# EAGLE board LedEsp32_manualroute (EAGLE 9.6.2)
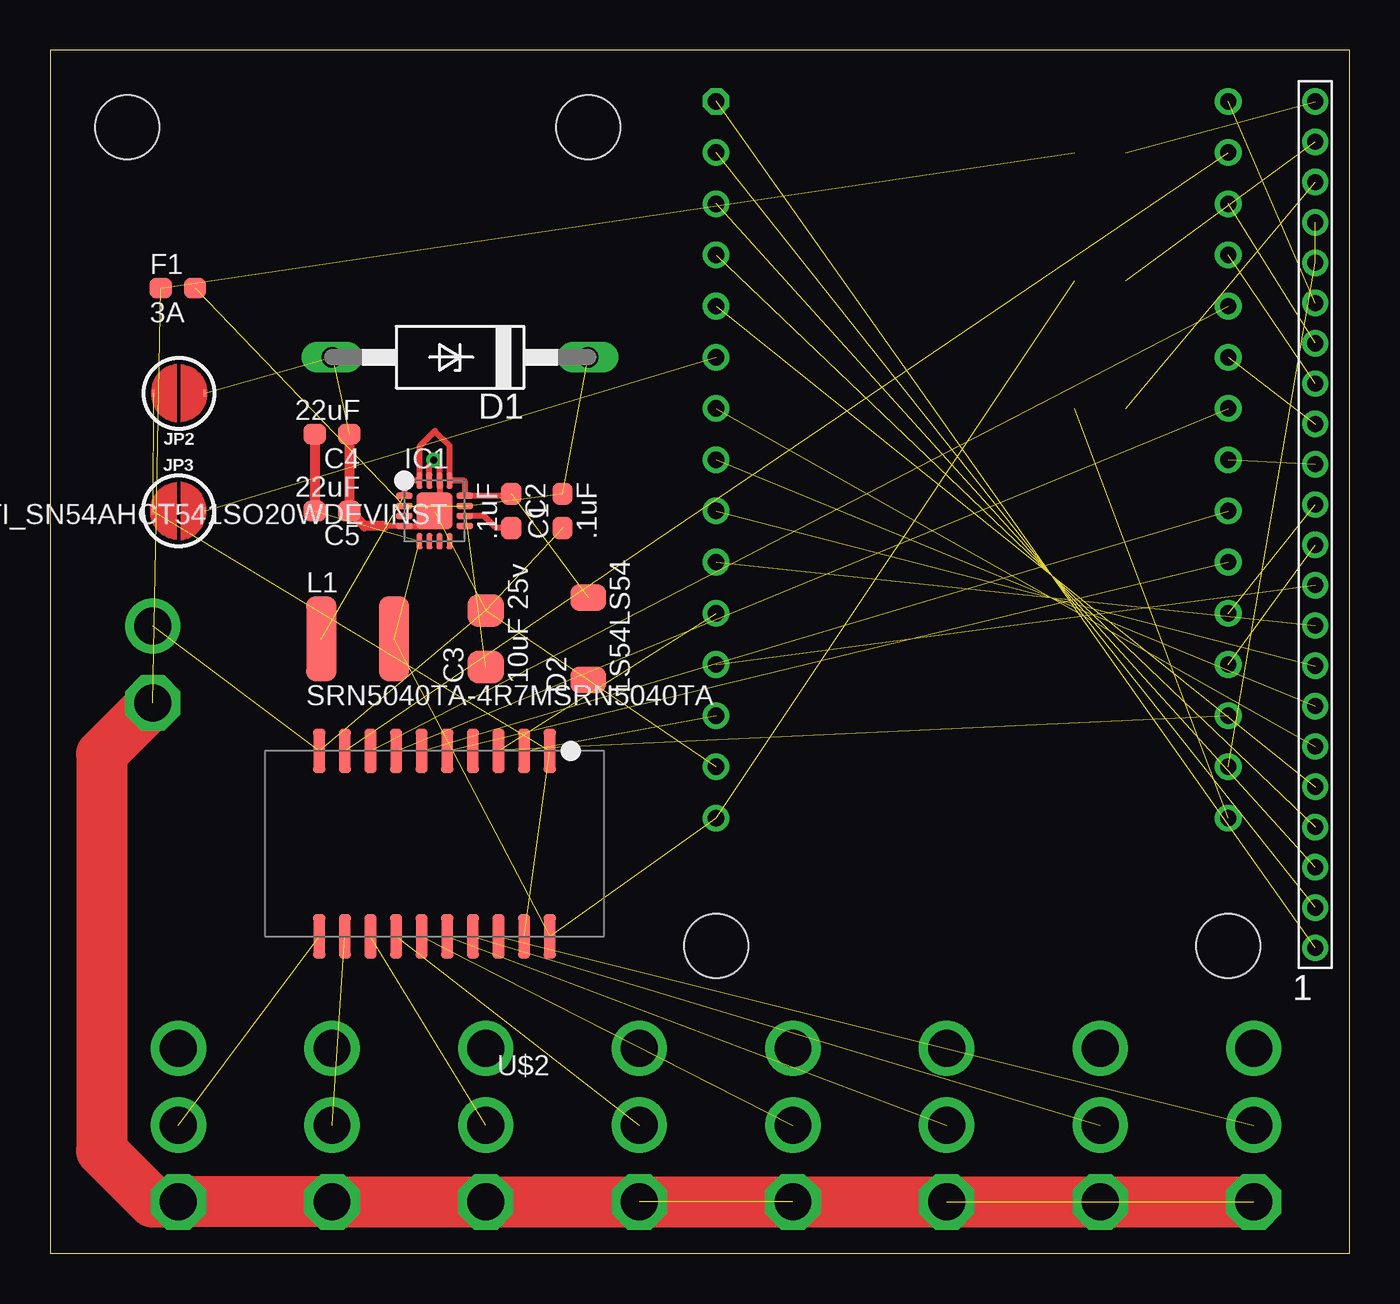
[diagram p0: board, top side]
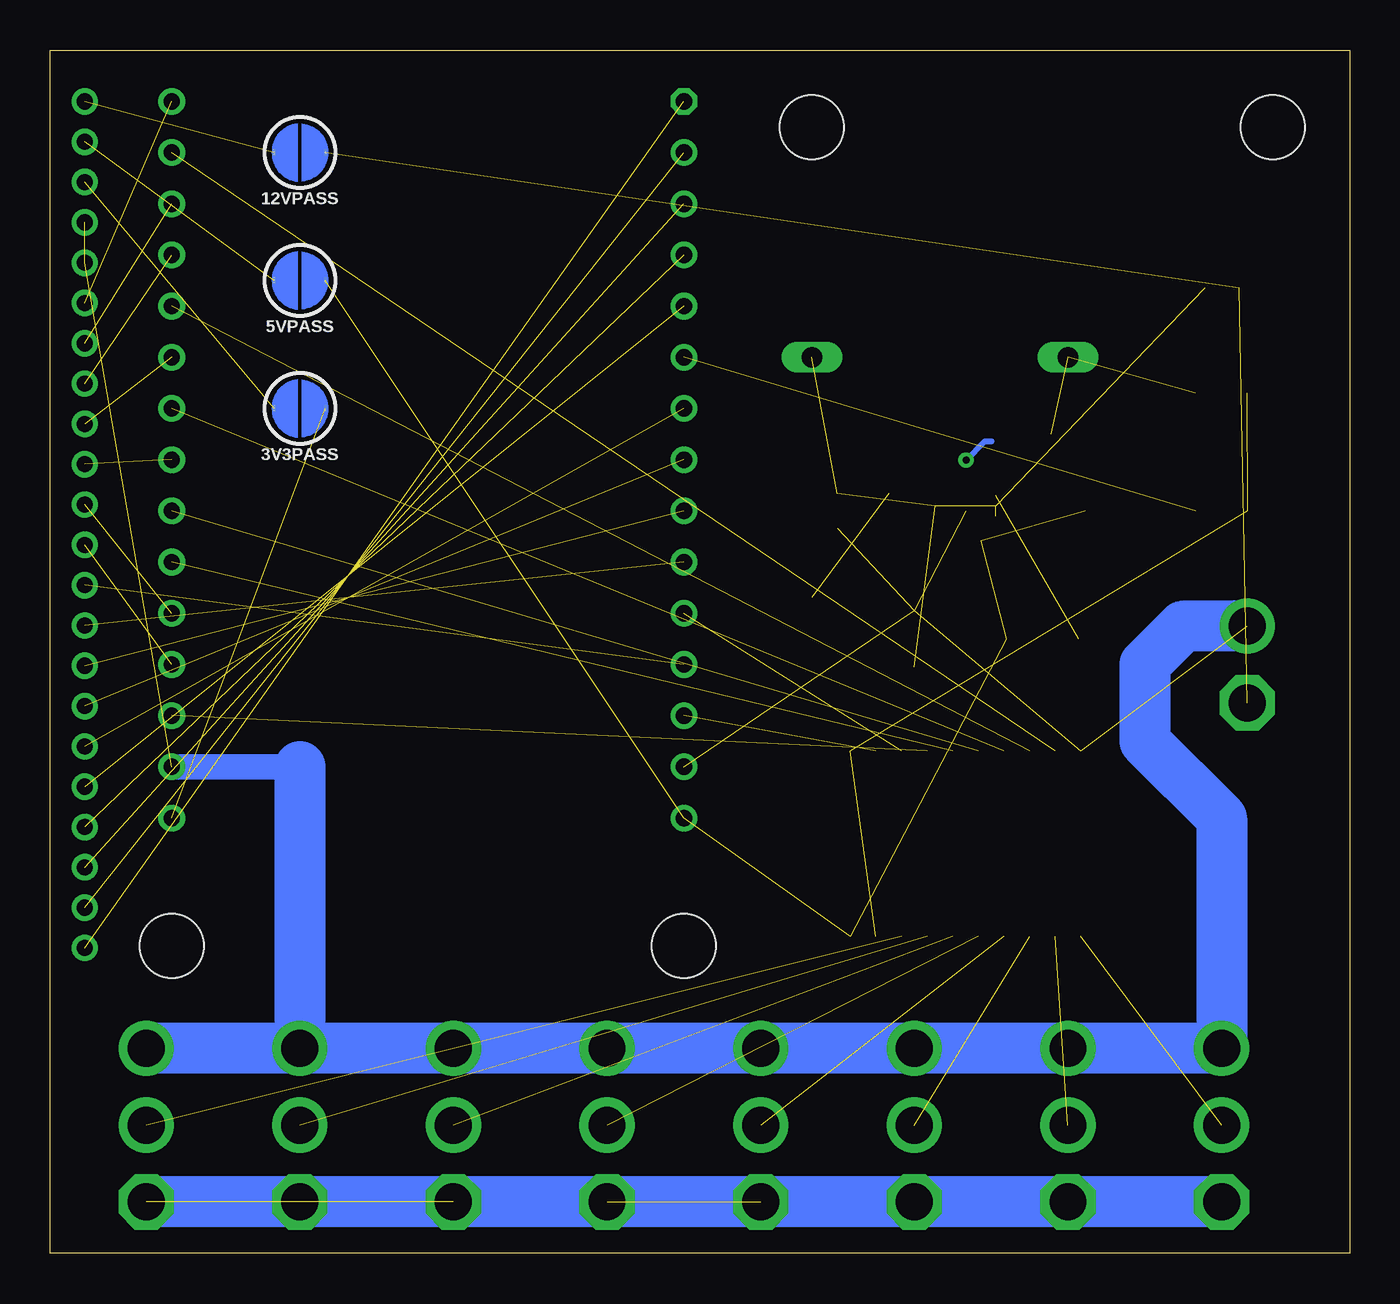
[diagram p1: board, bottom side, seen from below]

Size 64.44 x 59.68 mm. Coordinates in mm from the lower left corner, seen from the top.
Outline: 0,0 64.44,0 64.44,59.68 0,59.68 0,0
Copper layers (1*16): Top 0.035mm / dielectric 1.5mm / Bottom 0.035mm
Design rules "default *": minimum track width 8mil, minimum drill 0.35mm, track to track 8mil, track to pad 8mil, pad to pad 8mil, via to via 8mil, smd to smd 8mil, copper to edge 40mil, drill to drill 6mil, minimum pad ring 10mil, minimum via ring 8mil, stop-mask expansion 4mil, vias tented up to drill 0mil, thermal gap 10mil
Holes 3.17 mm at 3.81,55.88 26.67,55.88 33.02,15.24 58.42,15.24

## Footprints (pad centres in the part's own frame; a part is rotated, then mirrored left to right if it is on the bottom)
SMT-JUMPER_2_NO_SILK_ROUND = smd 0.152 x 0.305: 1 -1.27,0; 2 1.27,0
C0603 = smd 1.1 x 1: 1 -0.85,0; 2 0.85,0
C1206 = smd 1.6 x 1.8: 1 -1.4,0; 2 1.4,0
F126Z12 = drill 1.016 long: A 6.35,0; C -6.35,0
LS54 = smd 1.3 x 1.75: 1 -2.05,0; 2 2.05,0
R0603 = smd 1.1 x 1: 1 -0.85,0; 2 0.85,0
QFN16 = smd 0.8 x 0.3: 1 -1.5,0.75; 2 -1.5,0.25; 3 -1.5,-0.25; 4 -1.5,-0.75; 9 1.5,-0.75; 10 1.5,-0.25; 11 1.5,0.25; 12 1.5,0.75 | smd 0.3 x 0.8: 5 -0.75,-1.5; 6 -0.25,-1.5; 7 0.25,-1.5; 8 0.75,-1.5; 13 0.75,1.5; 14 0.25,1.5; 15 -0.25,1.5; 16 -0.75,1.5 | smd 1.8 x 1.8: TPAD 0,0
SRN5040TA = smd 1.5 x 4.2: 1 -1.8,0; 2 1.8,0
EXTCON = drill 1.829 octagon: 1 -3.81,0 | drill 1.829: 2 0,0; 3 3.81,0
ESP32_DEVKITV1 = drill 0.813 octagon: 1 -17.78,-12.7 | drill 0.813: 2 -15.24,-12.7; 3 -12.7,-12.7; 4 -10.16,-12.7; 5 -7.62,-12.7; 6 -5.08,-12.7; 7 -2.54,-12.7; 8 0,-12.7; 9 2.54,-12.7; 10 5.08,-12.7; 11 7.62,-12.7; 12 10.16,-12.7; 13 12.7,-12.7; 14 15.24,-12.7; 15 17.78,-12.7; 16 17.78,12.7; 17 15.24,12.7; 18 12.7,12.7; 19 10.16,12.7; 20 7.62,12.7; 21 5.08,12.7; 22 2.54,12.7; 23 0,12.7; 24 -2.54,12.7; 25 -5.08,12.7; 26 -7.62,12.7; 27 -10.16,12.7; 28 -12.7,12.7; 29 -15.24,12.7; 30 -17.78,12.7
SO20W = smd 0.6 x 2.2: 1 -5.715,-4.6; 2 -4.445,-4.6; 3 -3.175,-4.6; 4 -1.905,-4.6; 5 -0.635,-4.6; 6 0.635,-4.6; 7 1.905,-4.6; 8 3.175,-4.6; 9 4.445,-4.6; 10 5.715,-4.6; 11 5.715,4.6; 12 4.445,4.6; 13 3.175,4.6; 14 1.905,4.6; 15 0.635,4.6; 16 -0.635,4.6; 17 -1.905,4.6; 18 -3.175,4.6; 19 -4.445,4.6; 20 -5.715,4.6
1X22 = drill 0.8: 1 -21,0; 2 -19,0; 3 -17,0; 4 -15,0; 5 -13,0; 6 -11,0; 7 -9,0; 8 -7,0; 9 -5,0; 10 -3,0; 11 -1,0; 12 1,0; 13 3,0; 14 5,0; 15 7,0; 16 9,0; 17 11,0; 18 13,0; 19 15,0; 20 17,0; 21 19,0; 22 21,0
PWRWIREP = drill 1.829 octagon: 1 -1.905,0 | drill 1.829: 2 1.905,0

## Placement (x,y rotation side)
3V3PASS  JUMPER-SMT_2_NO_SILK_ROUND  [SMT-JUMPER_2_NO_SILK_ROUND]  52.07,41.91 180 bottom
5VPASS  JUMPER-SMT_2_NO_SILK_ROUND  [SMT-JUMPER_2_NO_SILK_ROUND]  52.07,48.26 180 bottom
12VPASS  JUMPER-SMT_2_NO_SILK_ROUND  [SMT-JUMPER_2_NO_SILK_ROUND]  52.07,54.61 180 bottom
C1  .1uF  [C0603]  25.4,36.83 90 top
C2  .1uF  [C0603]  22.86,36.83 270 top
C3  10uF 25v  [C1206]  21.59,30.48 90 top
C4  22uF  [C0603]  13.97,40.64 180 top
C5  22uF  [C0603]  13.97,36.83 180 top
D1  BZY97  [F126Z12]  20.32,44.45 180 top
D2  LS54LS54  [LS54]  26.67,30.48 90 top
F1  3A  [R0603]  6.32,47.88 0 top
IC1  TS30013QFN16  [QFN16]  19.05,36.83 0 top
JP2  JUMPER-SMT_2_NO_SILK_ROUND  [SMT-JUMPER_2_NO_SILK_ROUND]  6.38,42.67 180 top
JP3  JUMPER-SMT_2_NO_SILK_ROUND  [SMT-JUMPER_2_NO_SILK_ROUND]  6.35,36.83 0 top
L1  SRN5040TA-4R7MSRN5040TA  [SRN5040TA]  15.24,30.48 0 top
LC$0  EXTCONEXTCONDEVINST  [EXTCON]  59.69,6.35 90 top
LC$1  EXTCONEXTCONDEVINST  [EXTCON]  52.07,6.35 90 top
LC$2  EXTCONEXTCONDEVINST  [EXTCON]  44.45,6.35 90 top
LC$3  EXTCONEXTCONDEVINST  [EXTCON]  36.83,6.35 90 top
LC$4  EXTCONEXTCONDEVINST  [EXTCON]  29.21,6.35 90 top
LC$5  EXTCONEXTCONDEVINST  [EXTCON]  21.59,6.35 90 top
LC$6  EXTCONEXTCONDEVINST  [EXTCON]  13.97,6.35 90 top
LC$7  EXTCONEXTCONDEVINST  [EXTCON]  6.35,6.35 90 top
U$1  ESP32_DEVKITV1ESP32_DEVKITV1DEVINST  [ESP32_DEVKITV1]  45.72,39.37 270 top
U$2  TI_SN54AHCT541SO20WDEVINST  [SO20W]  19.05,20.32 180 top
U$3  1X22THM  [1X22]  62.74,36.14 90 top
U$8  PWRWIREDPWRWIREP  [PWRWIREP]  5.08,29.21 90 top

## Library data of the parts
3V3PASS 5VPASS 12VPASS JP2 JP3 = SparkFun-Jumpers
C1-C5 D2 F1 IC1 L1 LC$0 LC$1-LC$7 U$8 = ledinlinesupply
D1 = diode
U$1 U$2 = esp32
U$3 = adafruit

## Nets
GND: C1.1 C3.2 C4.1 C5.1 D1.A D2.1 IC1.4 IC1.14 IC1.15 IC1.TPAD JP2.1 LC$0.3 LC$1.3 LC$2.3 LC$3.3 LC$4.3 LC$5.3 LC$6.3 LC$7.3 U$1.14 U$1.17 U$2.10 U$3.18 U$3.19 U$8.2
N$1: LC$0.2 U$2.18
N$2: U$1.19 U$3.11
N$3: C2.1 D2.2 IC1.1 IC1.12 IC1.13 IC1.16 L1.1
N$5: C2.2 IC1.10
N$6: LC$1.2 U$2.17
N$7: LC$2.2 U$2.16
N$8: LC$3.2 U$2.15
N$9: LC$4.2 U$2.14
N$10: LC$5.2 U$2.13
N$11: LC$6.2 U$2.12
N$12: LC$7.2 U$2.11
N$13: U$1.11 U$2.3
N$14: U$1.13 U$2.2
N$15: U$1.18 U$2.4
N$16: U$1.21 U$2.5
N$17: U$1.22 U$2.6
N$18: U$1.24 U$2.7
N$19: U$1.26 U$2.8
N$20: U$1.29 U$2.9
N$21: JP2.2 JP3.1 U$2.1 U$2.19
N$22: JP3.2 U$1.6
N$23: U$1.1 U$3.1
N$24: U$1.2 U$3.2
N$25: U$1.3 U$3.3
N$26: U$1.4 U$3.4
N$27: U$1.5 U$3.5
N$28: U$1.7 U$3.6
N$29: U$1.8 U$3.7
N$30: U$1.9 U$3.8
N$31: U$1.10 U$3.9
N$32: U$1.12 U$3.10
N$34: U$1.20 U$3.12
N$35: U$1.23 U$3.13
N$36: U$1.25 U$3.14
N$37: U$1.27 U$3.15
N$38: U$1.28 U$3.16
N$39: U$1.30 U$3.17
N$40: 5VPASS.2 U$3.21
N$41: 12VPASS.2 U$3.22
N$42: 3V3PASS.1 U$1.16
N$43: 3V3PASS.2 U$3.20
N$44: C1.2 C3.1 D1.C F1.2 IC1.2 IC1.3 IC1.11
V5: 5VPASS.1 C4.2 C5.2 IC1.5 L1.2 U$1.15 U$2.20
VCC: 12VPASS.1 F1.1 LC$0.1 LC$1.1 LC$2.1 LC$3.1 LC$4.1 LC$5.1 LC$6.1 LC$7.1 U$8.1

## Tracks (layer width: path | path; a pad name or v marks a point on that pad's centre or on a via)
GND  (via drill 0.35)  (10 unrouted)
  Top 0.305: 19.15,36.93 19.3,37.08 IC1.14 19.3,39.07 v19.03,39.35 18.8,39.12 IC1.15 | 19.15,36.93 IC1.TPAD | 19.15,36.93 19.15,36.52 18.71,36.08 IC1.4 16.55,36.08 16.54,36.07
  Top 0.508: 16.54,36.07 15.58,36.07 C5.1 C4.1
  Bottom 0.305: v19.03,39.35 18.09,40.28 17.75,40.28
  Bottom 1.27: U$1.17 52.07,24.13
  Bottom 2.54: U$8.2 8.26,31.11 10.16,29.21 10.16,25.4 6.35,21.59 LC$7.3 LC$6.3 LC$5.3 LC$4.3 LC$3.3 LC$2.3 LC$1.3 | LC$1.3 LC$0.3 | 52.07,24.13 LC$1.3
N$1  (1 unrouted)
N$2  (1 unrouted)
N$3  (2 unrouted)
  Top 0.305: C2.1 22.76,37.58 IC1.12 20.55,38.3 20.52,38.33 IC1.13 19.8,40.07 19.07,40.79 18.3,40.02 IC1.16 17.55,38.33 IC1.1
N$5
  Top 0.305: C2.2 22.11,35.98 21.51,36.58 IC1.10
N$6  (1 unrouted)
N$7  (1 unrouted)
N$8  (1 unrouted)
N$9  (1 unrouted)
N$10  (1 unrouted)
N$11  (1 unrouted)
N$12  (1 unrouted)
N$13  (1 unrouted)
N$14  (1 unrouted)
N$15  (1 unrouted)
N$16  (1 unrouted)
N$17  (1 unrouted)
N$18  (1 unrouted)
N$19  (1 unrouted)
N$20  (1 unrouted)
N$21  (3 unrouted)
N$22  (1 unrouted)
N$23  (1 unrouted)
N$24  (1 unrouted)
N$25  (1 unrouted)
N$26  (1 unrouted)
N$27  (1 unrouted)
N$28  (1 unrouted)
N$29  (1 unrouted)
N$30  (1 unrouted)
N$31  (1 unrouted)
N$32  (1 unrouted)
N$34  (1 unrouted)
N$35  (1 unrouted)
N$36  (1 unrouted)
N$37  (1 unrouted)
N$38  (1 unrouted)
N$39  (1 unrouted)
N$40  (1 unrouted)
N$41  (1 unrouted)
N$42  (1 unrouted)
N$43  (1 unrouted)
N$44  (6 unrouted)
V5  (5 unrouted)
  Top 0.508: C4.2 C5.2
VCC  (5 unrouted)
  Top 2.54: U$8.1 2.54,24.77 2.54,5.08 5.08,2.54 LC$7.1 LC$6.1 LC$0.1
  Bottom 2.54: LC$7.1 LC$5.1 | LC$5.1 LC$4.1 | LC$5.1 LC$0.1